# Altium PCB MODULIQ_TDC.PcbDoc (part 2 of 2)
Units mm, origin at the board's own origin, x right, y up, seen from the top; angles counter-clockwise.
Board outline 49.15 x 76.65 mm, 4 copper layers (L1, P2, L3, L4), stack 1.512 mm thick; 110 components, 101 nets, 467 pads, 506 vias.
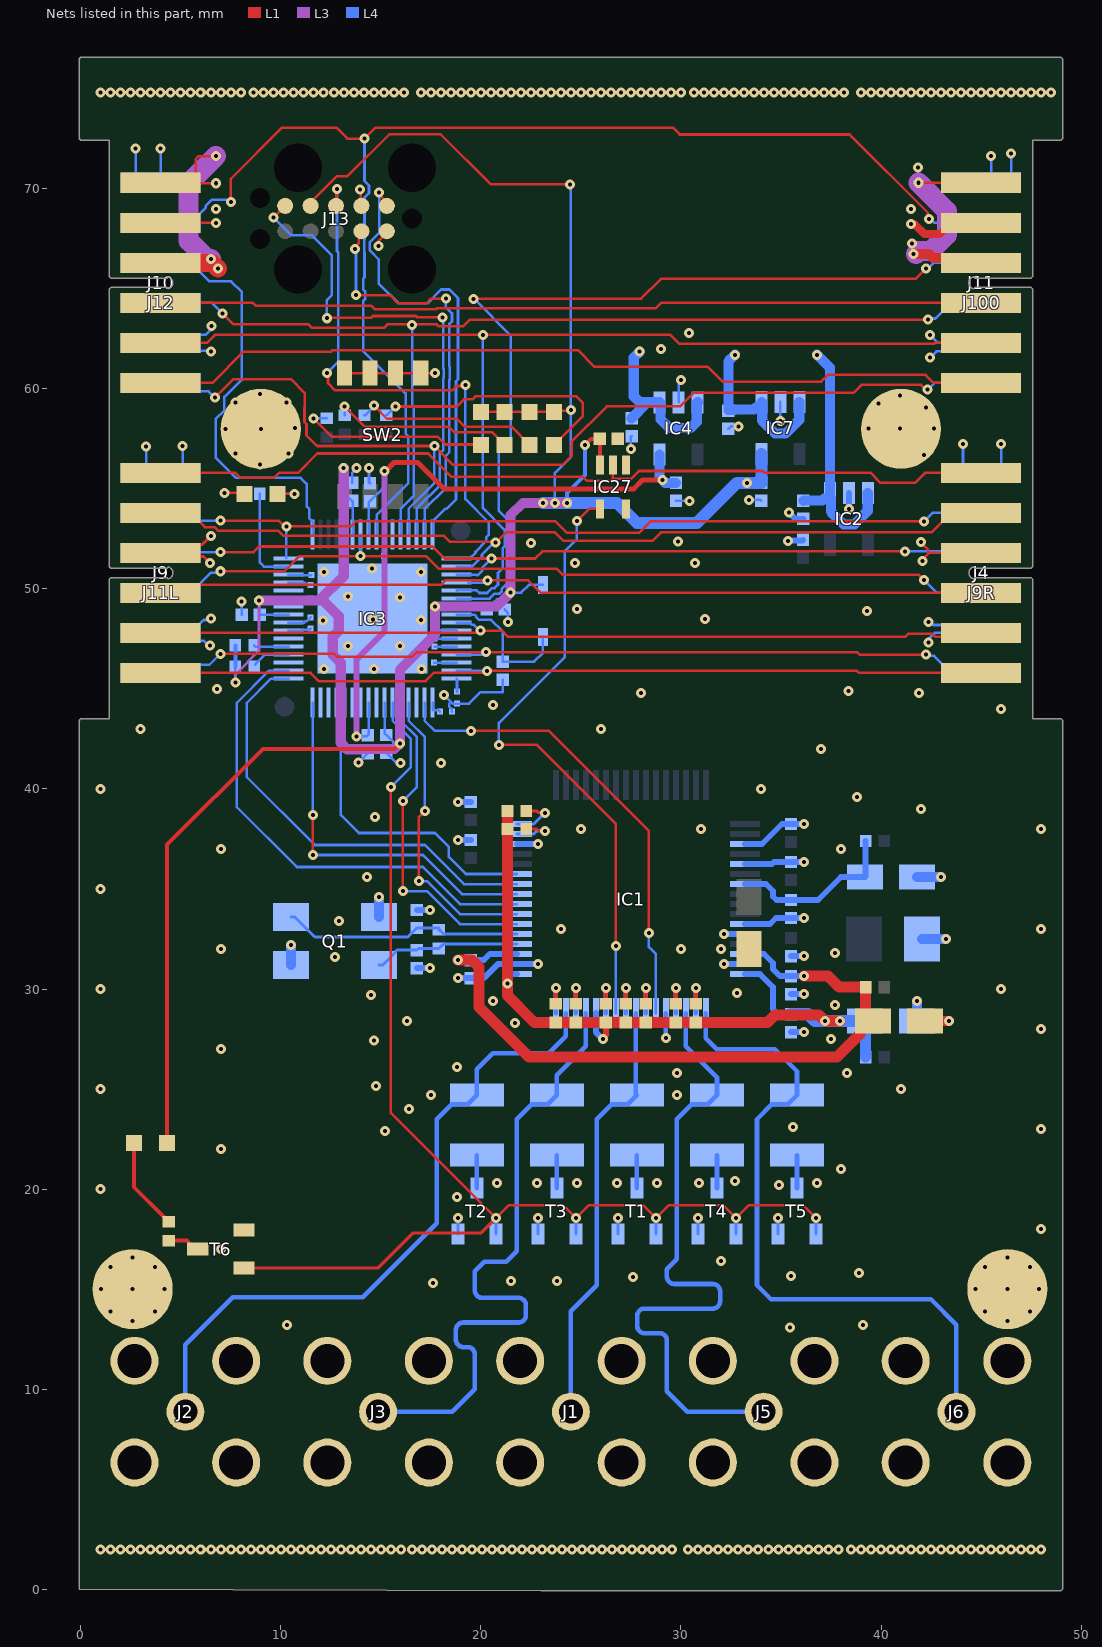
[diagram p4: the nets of this part, all layers, seen from the top]

## Via types
v1: diameter 0.5, hole 0.2, L1 to L4, tented both sides, 505 vias
v2: diameter 0.5, hole 0.2, L1 to L4, 1 vias

## Nets (pads, with @x,y where several pads share a name; then routed paths per layer and width w, separated by ;. In a path a pad name is that pad's centre, name@x,y a point inside that pad or via, vN(x,y) a via of type N, cw(c..) or ccw(c..) an arc to the next point about the centre after c; other vN are vias at no path point) (continued)
GND: C1.1 C2.1 C3.1 C4.1 C5.1 C6.2 C7.1 C8.1 C9.2 C10.1 C11.1 C12.2 C13.1 C14.1 C15.1 C16.1 C17.2 C18.1 C19.1 C20.1 C21.1 C22.1 C23.2 C24.1 C25.1 C26.1 C27.1 C61.1 C231.1 C232.1 IC1.19 IC1.21 IC1.27 IC1.28 IC1.31 IC1.37 IC1.50 IC1.62 IC2.2 IC3.65 IC4.2 IC7.2 IC27.1 IC27.5 J1.2 J2.2 J3.2 J4.1 J4.5 J4.9 J5.2 J6.2 J9.1 J9.5 J9.9 J9R.2 J9R.9 J10.7 J10.11 J11.7 J11.11 J11L.2 J11L.9 J12.9 J13.2 J13.10 J100.9 LD1.1 MP1.1 MP2.1 MP3.1 MP4.1 NT1.2 NT2.2 NT3.2 NT4.2 NT5.2 NT6.2 NT7.2 NT9.2 NT10.2 NT11.2 NT12.2 NT13.2 Q1.2 Q1.4 SW2.5 SW2.6 SW2.7 SW2.8 T1.2 T2.2 T3.2 T4.2 T5.2 T6.2 | length 104.2
  L1 w0.13: v1(6.504,61.86) v1@6.543,61.821 ; v1(7.187,54.803) 8.122,54.803 LD1.1@8.175,54.75 ; SW2.8@13.19,60.78 v1(17.7,60.78) ; v1(13.958,69.972) 13.994,69.937 13.994,69.181 J13.2@14.03,69.145 ; v1(14.896,67.13) 14.896,67.39 15.3,67.794 J13.10@15.3,67.875 ; v1(42,52.352) 42,52.305 42.369,51.936 42.369,51.8 ; v1(42.075,51.398) 42.075,51.478 42.369,51.772 42.369,51.8 ; J4.9@45,51.8 42.369,51.8
  L1 w0.152: v1(6.466,51.289) 6.139,51.616 4.184,51.616 J11L.2@4,51.8 5.5,51.8 5.924,52.224 6.081,52.224 v1(6.505,52.648)
  L1 w0.5: C6.2@42.2,28.4 v1(43.4,28.4)
  L4 w0.13: v1(2.75,72) 2.75,70.698 3.148,70.3 J10.7@4,70.3 v1(4,72) ; v1(3.269,57.107) 3.269,56.198 3.667,55.8 J9.1@4,55.8 4.702,55.8 5.1,56.198 v1(5.1,57.144) ; J11L.9@4,47.8 4.398,47.402 6.156,47.402 6.383,47.175 v1(6.463,47.175) v1@6.491,47.203 ; J11L.9@5.5,47.8 6.149,48.448 6.454,48.448 v1(6.521,48.515) ; v1(6.504,61.86) 6.463,61.902 4.398,61.902 J12.9@4,62.3 4.398,62.698 6.247,62.698 6.487,62.938 6.487,63.093 v1(6.543,63.15) ; v1(8.047,49.366) 8.047,48.718 C19.1@8.05,48.715 ; C4.1@13.57,55.3 13.566,55.305 13.566,55.793 13.779,56.006 v1(13.779,56.043) ; v1(13.89,41.328) C21.1@14.35,41.788 ; v1(14.411,56.043) 14.411,55.334 C232.1@14.46,55.285 ; C2.1@15.275,41.798 15.781,41.291 v1(15.988,41.291) ; v1(18.152,44.7) 18.587,44.265 NT2.2@18.808,44.265 19.408,44.265 19.979,44.836 21.1,44.836 C18.1@21.1,45.465 ; 18.43,44.265 18.43,44.108 18.55,43.988 NT3.2@18.55,43.865 ; C3.1@21.191,48.97 21.353,48.807 v1(21.353,48.35) ; v1(27.5,57) 27.5,57.598 C231.1@27.535,57.633 ; C61.1@29.752,54.4 29.754,54.398 v1(30.421,54.398) ; IC4.2@29.887,59.325 29.887,60.245 30,60.359 v1(30,60.439) ; C20.1@32.372,57.997 32.5,58.125 v1(32.875,58.125) ; v1(33.403,54.453) 33.966,54.453 C11.1@34.019,54.4 ; v1(34.969,58.4) IC7.2@34.969,59.35 ; v1(42.369,47.326) 42.401,47.358 42.401,47.515 42.686,47.8 J9R.9@45,47.8 44.602,48.198 42.607,48.198 42.455,48.35 v1(42.375,48.35) ; v1(42.455,61.565) 42.766,61.876 44.576,61.876 J100.9@45,62.3 42.854,62.3 v1(42.455,62.698) ; v1(44.1,57.25) 44.1,56.198 44.498,55.8 J4.1@45,55.8 45.602,55.8 46,56.198 v1(46,57.25) ; v1(45.5,71.625) 45.5,70.698 45.102,70.3 J11.7@45,70.3 46.102,70.3 46.5,70.698 46.5,71.625 v1(46.5,71.75)
  L4 w0.152: T2.2@18.85,17.75 v1(18.85,18.55) ; T3.2@22.85,17.75 v1(22.85,18.55) ; T1.2@26.85,17.75 v1(26.85,18.55) ; T4.2@30.85,17.75 v1(30.85,18.55) ; T5.2@34.85,17.75 v1(34.85,18.55)
  L4 w0.23: v1(29.25,27.55) IC1.37@29.25,28.8
  L4 w0.3: C5.1@16.8,31.05 v1(17.45,31.05) ; C1.1@16.8,33.95 v1(17.45,33.95) ; v1(18.85,30.55) C8.1@19.5,30.55 20.15,30.55 20.85,31.25 IC1.50@21.8,31.25 v1(22.85,31.25) ; v1(18.85,37.45) C13.1@19.5,37.45 ; v1(18.85,39.35) C15.1@19.5,39.35 ; IC1.62@21.8,37.25 v1(22.85,37.25) ; v1(32.15,31.25) IC1.31@33.2,31.25 ; v1(32.15,32.75) IC1.28@33.2,32.75 ; IC1.27@33.2,33.25 34.45,33.25 34.75,33.55 C24.1@35.5,33.55 v1(36.15,33.55) ; IC1.21@33.2,36.25 34.55,36.25 34.65,36.35 C14.1@35.5,36.35 v1(36.15,36.35) ; IC1.19@33.2,37.25 34.05,37.25 35.05,38.25 C16.1@35.5,38.25 v1(36.15,38.25) ; v1(35.35,52.387) 35.382,52.418 36.068,52.418 C26.1@36.1,52.45 ; v1(35.4,53.814) 35.712,53.503 C25.1@36.12,53.503 ; C10.1@35.5,27.85 v1(36.15,27.85) ; C7.1@35.5,29.75 v1(36.15,29.75) ; C22.1@35.5,31.65 v1(36.15,31.65) ; v1(38.4,54) IC2.2@38.4,54.8
  L4 w0.5: Q1.2@10.5,31.2 v1(10.5,32.2) ; Q1.4@14.9,33.6 v1(14.9,34.6) ; C9.2@41.8,28.4 v1(41.8,29.4) ; C23.2@41.8,35.6 v1(43,35.6) ; C17.2@42.05,32.5 v1(43.25,32.5)
  other v1: 1,2 1.5,2 2,2 2.5,2 3,2 3.5,2 4,2 4.5,2 5,2 5.5,2 6,2 6.5,2 7,2 7.5,2 8,2 8.5,2 9,2 9.5,2 10,2 10.5,2 11,2 11.5,2 12,2 12.516,2 13.016,2 13.516,2 14.016,2 14.516,2 15.016,2 15.516,2 16.016,2 16.549,2 17.049,2 17.549,2 18.049,2 18.549,2 19.049,2 19.549,2 20.049,2 20.549,2 21.049,2 21.549,2 22.049,2 22.549,2 23.049,2 23.549,2 24.049,2 24.549,2 25.049,2 25.549,2 26.049,2 26.549,2 27.049,2 27.549,2 28.049,2 28.549,2 29.049,2 29.549,2 30.35,2 30.85,2 31.35,2 31.85,2 32.35,2 32.85,2 33.35,2 33.85,2 34.366,2 34.866,2 35.366,2 35.866,2 36.366,2 36.866,2 37.366,2 37.866,2 38.5,2 39,2 39.5,2 40,2 40.5,2 41,2 41.5,2 42,2 42.5,2 43,2 43.5,2 44,2 44.5,2 45,2 45.5,2 46,2 46.5,2 47,2 47.5,2 48,2 35.443,13.083 10.3,13.2 39.1,13.2 2.6,13.415 46.315,13.415 1.479,13.879 3.721,13.879 45.194,13.879 47.436,13.879 1.015,15 2.6,15 4.185,15 44.73,15 46.315,15 47.9,15 17.6,15.3 21.5,15.4 23.8,15.4 27.6,15.6 35.507,15.669 38.9,15.8 1.479,16.121 3.721,16.121 45.194,16.121 47.436,16.121 32,16.4 2.6,16.585 46.315,16.585 7,17 48,18 18.8,19.6 1,20 34.9,20.2 20.8,20.3 22.8,20.3 24.8,20.3 26.8,20.3 28.8,20.3 30.9,20.3 36.8,20.3 32.7,20.4 38,21 7,22 15.2,22.9 48,23 35.6,23.1 16.4,24 17.5,24.7 29.8,24.7 1,25 41,25 14.766,25.145 29.8,25.8 38.3,25.8 18.8,26.1 7,27 14.663,27.426 37.5,27.5 48,28 21.7,28.3 16.3,28.4 37.7,29.2 20.6,29.4 14.5,29.7 32.8,29.8 1,30 46,30 12.7,31.6 37.7,31.8 7,32 30,32 32,32 24,33 48,33 12.9,33.4 1,35 14.3,35.6 7,37 38,37 25,38 31,38 48,38 14.7,38.6 42,39 38.8,39.6 1,40 34,40 18,41.3 37,42 3,43 26,43 46,44 20.6,44.2 28,44.8 41.9,44.8 38.372,44.895 6.8,45 12.162,45.995 14.66,45.995 17.021,45.995 13.356,47.156 15.96,47.156 12.099,48.428 17.01,48.438 14.599,48.468 31.2,48.5 39.3,48.9 24.8,49 15.96,49.562 13.356,49.618 12.151,50.836 17.011,50.838 14.566,51.016 24.7,51.3 30.7,51.3 22.5,52.3 29.841,52.357 8.95,56.228 42.144,56.688 7.73,56.758 10.388,56.758 7.225,58 9,58 39.369,58.013 40.96,58.013 42.644,58.013 10.7,58.05 42.244,59.063 39.869,59.263 7.73,59.325 10.274,59.325 40.96,59.665 8.955,59.75 29,62 30.4,62.8 1,74.8 1.5,74.8 2,74.8 2.5,74.8 3,74.8 3.5,74.8 4,74.8 4.5,74.8 5,74.8 5.5,74.8 6,74.8 6.5,74.8 7,74.8 7.5,74.8 8,74.8 8.641,74.8 9.141,74.8 9.641,74.8 10.141,74.8 10.641,74.8 11.141,74.8 11.641,74.8 12.141,74.8 12.656,74.8 13.156,74.8 13.656,74.8 14.156,74.8 14.656,74.8 15.156,74.8 15.656,74.8 16.156,74.8 17,74.8 17.5,74.8 18,74.8 18.5,74.8 19,74.8 19.5,74.8 20,74.8 20.5,74.8 21,74.8 21.5,74.8 22,74.8 22.5,74.8 23,74.8 23.5,74.8 24,74.8 24.5,74.8 25,74.8 25.5,74.8 26,74.8 26.5,74.8 27,74.8 27.5,74.8 28,74.8 28.5,74.8 29,74.8 29.5,74.8 30,74.8 30.641,74.8 31.141,74.8 31.641,74.8 32.141,74.8 32.641,74.8 33.141,74.8 33.641,74.8 34.141,74.8 34.656,74.8 35.156,74.8 35.656,74.8 36.156,74.8 36.656,74.8 37.156,74.8 37.656,74.8 38.156,74.8 39,74.8 39.5,74.8 40,74.8 40.5,74.8 41,74.8 41.5,74.8 42,74.8 42.5,74.8 43,74.8 43.5,74.8 44,74.8 44.5,74.8 45,74.8 45.5,74.8 46,74.8 46.5,74.8 47,74.8 47.5,74.8 48,74.8 48.5,74.8
HSPI_AD0: IC3.18 J4.8 J9.8 J9R.1 J11L.1 | length 45.1
  L1 w0.13: J9.8@4,53.8 5.5,53.8 6.21,53.09 6.688,53.09 6.862,52.916 9.857,52.916 10.126,52.648 18.152,52.648 18.448,52.352 20.703,52.352 v1(20.737,52.318) ; v1@20.737,52.352 20.772,52.352 21.249,52.829 23.7,52.829 24.129,52.4 28.571,52.4 29,52.829 42.529,52.829 43.5,53.8 J4.8@45,53.8
  L4 w0.13: IC3.18@18.788,51.115 19.559,51.115 20.057,51.612 20.057,51.715 20.659,52.318 v1(20.737,52.318)
HSPI_AD1: IC3.20 J4.10 J9.10 J9R.3 J11L.3 | length 42.5
  L1 w0.13: J9.10@4,49.8 5.5,49.8 5.9,50.2 18,50.2 18.231,50.431 v1(20.333,50.431) 22.369,50.431 23,49.8 J4.10@45,49.8
  L4 w0.13: IC3.20@19.373,50.315 20.123,50.315 20.239,50.431 v1(20.333,50.431)
HSPI_AD2: IC3.31 J4.12 J9.12 J9R.5 J11L.5 | length 42.9
  L1 w0.13: J9.12@4,45.8 11.488,45.8 11.894,45.394 17.232,45.394 17.637,45.8 20.131,45.8 20.219,45.888 v1(20.3,45.888) ; v1@20.3,45.915 38.785,45.915 38.9,45.8 J4.12@45,45.8
  L4 w0.13: IC3.31@18.788,45.915 20.273,45.915 v1(20.3,45.888)
HSPI_AD3: IC3.19 J4.3 J9.3 J9R.7 J11L.7 | length 43.7
  L1 w0.13: v1(6.975,51.836) 8.641,51.836 8.923,52.119 17.581,52.119 18.183,51.517 v1(20.534,51.517) 22.717,51.517 23.075,51.875 v1(41.2,51.875)
  L4 w0.13: J9.3@4,51.8 4.036,51.836 v1(6.975,51.836) ; IC3.19@18.788,50.715 19.758,50.715 19.788,50.685 19.846,50.685 20.062,50.901 20.062,51.046 v1(20.534,51.517) ; v1(41.2,51.875) 44.925,51.875 J4.3@45,51.8
HSPI_CLK: IC3.7 J4.4 J9.4 J9R.8 J11L.8 | length 43.6
  L1 w0.13: v1(6.995,50.882) 10.182,50.882 10.942,51.642 v1(13.976,51.642) 17.258,51.642 17.9,51 23.8,51 24.1,50.7 41.892,50.7 v1(42.155,50.436)
  L4 w0.13: J9.4@4,49.8 5.5,49.8 6.516,50.816 6.929,50.816 v1(6.995,50.882) ; v1(13.976,51.642) 13.982,51.648 13.982,52.709 IC3.7@13.988,52.715 ; v1(42.155,50.436) 42.792,49.8 J4.4@45,49.8
HSPI_CS0: IC3.29 J4.6 J9.6 J9R.10 J11L.10 | length 43.5
  L1 w0.13: v1(6.975,46.75) 12.663,46.75 12.813,46.6 16.561,46.6 16.803,46.842 v1(20.265,46.842) ; v1@20.311,46.796 20.357,46.842 38.802,46.842 38.934,46.71 v1(42.25,46.71)
  L4 w0.13: J9.6@4,45.8 4.4,46.2 6.425,46.2 v1(6.975,46.75) ; IC3.29@18.788,46.715 20.057,46.715 20.184,46.842 v1(20.265,46.842) ; v1(42.25,46.71) 42.307,46.653 42.647,46.653 43.5,45.8 J4.6@45,45.8
HSPI_ID: IC3.64 J4.2 J9.2 J9R.6 J11L.6 | length 43.6
  L1 w0.13: v1(6.988,53.414) 7.003,53.4 9.905,53.4 10.18,53.125 13.5,53.125 13.747,53.372 23.728,53.372 24.3,52.8 27.9,52.8 28.472,53.372 v1(42.154,53.372)
  L4 w0.13: J9.2@4,53.8 4.4,53.4 6.974,53.4 v1(6.988,53.414) ; IC3.64@10.274,51.539 v1(10.274,53.125) ; v1(42.154,53.372) 42.154,53.374 42.58,53.8 J4.2@45,53.8
HSPI_Q: IC3.25 J4.11 J9.11 J9R.4 J11L.4 | length 42.8
  L1 w0.13: J9.11@4,47.8 19.779,47.8 19.894,47.915 21.052,47.915 21.367,47.6 41.2,47.6 41.368,47.768 42.552,47.768 42.72,47.6 44.8,47.6 J4.11@45,47.8
  L4 w0.13: IC3.25@18.788,48.315 19.438,48.315 19.535,48.218 19.623,48.218 19.926,47.915 v1(19.988,47.915)
HSPI_sAD0: IC3.12 J10.10 J11.10 J12.8 J100.8 | length 52.9
  L1 w0.13: v1(7.089,63.775) 7.64,63.224 11.376,63.224 11.549,63.051 15.151,63.051 15.324,63.224 v1@16.56,63.224 ; v1(16.56,63.189) v1@16.56,63.224 ; v1(42.344,63.46) 19.46,63.46 19.118,63.118 17.892,63.118 17.786,63.224 v1@16.56,63.224
  L4 w0.13: J10.10@4,64.3 6.564,64.3 v1(7.089,63.775) ; IC3.12@15.988,52.715 15.988,54 16.65,54.661 16.65,55.5 16.654,55.505 16.654,59.067 16.573,59.148 16.573,63.176 v1(16.56,63.189) ; v1(42.344,63.46) 42.401,63.517 42.717,63.517 43.5,64.3 J11.10@45,64.3
HSPI_sAD1: IC3.13 J10.12 J11.12 J12.10 J100.10 | length 51.9
  L1 w0.13: v1(6.702,59.559) 7.626,60.483 10.502,60.483 11.189,59.796 11.189,59.066 11.188,59.065 11.188,58.335 11.283,58.239 11.283,57.672 11.812,57.142 v1(17.671,57.142) 18.609,56.204 24.084,56.204 24.535,56.655 24.535,57.359 26.296,59.121 29.943,59.121 30.618,59.796 38.619,59.796 39.026,60.203 41.913,60.203 41.915,60.201 42.006,60.201 42.24,59.967 v1(42.334,59.967)
  L4 w0.13: J10.12@4,60.3 4.425,59.875 6.386,59.875 v1(6.702,59.559) ; IC3.13@16.388,52.715 16.388,54.007 17.671,55.289 v1(17.671,57.142) ; v1(42.334,59.967) 42.341,59.967 42.673,60.3 J11.12@45,60.3
IO0: IC1.38 IC3.34 | length 23.6
  L1 w0.127: v1(19.5,42.9) 23.4,42.9 28.4,37.9 v1(28.4,32.8)
  L4 w0.127: IC3.34@17.188,44.315 17.188,43.412 17.7,42.9 v1(19.5,42.9) ; v1(28.4,32.8) 28.4,32.1 28.75,31.75 IC1.38@28.75,28.8
IO1: IC3.35
IO2: IC1.55 IC3.36 | length 15
  L1 w0.127: v1(16.9,35.4) 16.9,38.6 v1(17.2,38.9)
  L4 w0.127: IC3.36@16.388,44.315 16.388,43.412 17.2,42.6 v1(17.2,38.9) ; v1(16.9,35.4) 17.3,35.4 18.95,33.75 IC1.55@21.8,33.75
IO3: IC1.54 IC3.37 | length 16.4
  L1 w0.127: v1(16.1,34.9) v1(16.1,39.4)
  L4 w0.127: IC3.37@15.988,44.315 15.988,43.412 16.8,42.6 16.8,40.1 v1(16.1,39.4) ; v1(16.1,34.9) 17.3,34.9 18.95,33.25 IC1.54@21.8,33.25
IO4: IC3.38 T1.1 T2.1 T3.1 T4.1 T5.1 T6.1 | length 64.5
  L1 w0.127: v1(15.5,40.1) 15.5,23.8 v1(20.75,18.55) 21.4,19.2 24.1,19.2 v1(24.75,18.55) 25.4,19.2 28.1,19.2 v1(28.75,18.55) 29.4,19.2 32.1,19.2 v1(32.75,18.55) 33.4,19.2 36.1,19.2 v1(36.75,18.55)
  L1 w0.152: T6.1@8.15,16.05 14.85,16.05 16.6,17.8 20,17.8 v1(20.75,18.55)
  L4 w0.127: v1(15.5,40.1) 16.5,41.1 16.5,42.5 15.588,43.412 IC3.38@15.588,44.315
  L4 w0.152: T2.1@20.75,17.75 v1(20.75,18.55) ; T3.1@24.75,17.75 v1(24.75,18.55) ; T1.1@28.75,17.75 v1(28.75,18.55) ; T4.1@32.75,17.75 v1(32.75,18.55) ; T5.1@36.75,17.75 v1(36.75,18.55)
IO5: IC3.40
IO6: IC3.42
IO7: IC3.43
MODBUS_A: J10.4 J11.4 J12.3 J100.3 | length 41.3
  L1 w0.13: J10.4@4,64.3 8.608,64.3 8.762,64.146 14.528,64.146 14.705,63.969 17.746,63.969 17.801,64.024 28.737,64.024 29.012,64.3 J11.4@45,64.3
MODBUS_B: J10.6 J11.6 J12.5 J100.5 | length 42.6
  L1 w0.13: J10.6@4,60.3 6.584,60.3 8.144,61.86 12.515,61.86 12.59,61.936 24.845,61.936 25.68,61.1 31.341,61.1 32.083,60.358 37,60.358 37.342,60.7 42.226,60.7 42.626,60.3 J11.6@45,60.3
NetIC1_34: IC1.34 R17.1 | length 2
  L1 w0.23: R17.1@30.75,29.27 v1(30.75,30.05)
  L4 w0.23: IC1.34@30.75,28.8 v1(30.75,30.05)
NetIC1_36: IC1.36 R14.1 | length 2
  L1 w0.23: R14.1@29.75,29.27 v1(29.75,30.05)
  L4 w0.23: IC1.36@29.75,28.8 v1(29.75,30.05)
NetIC1_39: IC1.39 R5.1 | length 2
  L1 w0.23: R5.1@28.25,29.27 v1(28.25,30.05)
  L4 w0.23: IC1.39@28.25,28.8 v1(28.25,30.05)
NetIC1_41: IC1.41 R1.1 | length 2
  L1 w0.23: R1.1@27.25,29.27 v1(27.25,30.05)
  L4 w0.23: IC1.41@27.25,28.8 v1(27.25,30.05)
NetIC1_43: IC1.43 R8.1 | length 2
  L1 w0.23: R8.1@26.25,29.27 v1(26.25,30.05)
  L4 w0.23: IC1.43@26.25,28.8 v1(26.25,30.05)
NetIC1_46: IC1.46 R12.1 | length 2
  L1 w0.23: R12.1@24.75,29.27 v1(24.75,30.05)
  L4 w0.23: IC1.46@24.75,28.8 v1(24.75,30.05)
NetIC1_48: IC1.48 R7.1 | length 2
  L1 w0.23: R7.1@23.75,29.27 v1(23.75,30.05)
  L4 w0.23: IC1.48@23.75,28.8 v1(23.75,30.05)
NetIC1_63: IC1.63 R3.1 | length 2.4
  L1 w0.15: R3.1@22.27,38 22.8,38 22.864,37.936 23.164,37.936 v1(23.2,37.9)
  L4 w0.15: IC1.63@21.8,37.75 22.65,37.75 22.8,37.9 v1(23.2,37.9)
NetIC1_64: IC1.64 R4.1 | length 2.6
  L1 w0.15: R4.1@22.27,38.9 22.8,38.9 22.864,38.836 23.164,38.836 v1(23.2,38.8)
  L4 w0.15: IC1.64@21.8,38.25 22.65,38.25 v1(23.2,38.8)
NetLD1_2: LD1.2 R34.1 | length 1.6
  L1 w0.13: LD1.2@9.825,54.75 v1(10.677,54.75)
  L4 w0.13: R34.1@9.895,54.75 v1(10.677,54.75)
NetLD2_1: LD2.1 R6.1 | length 4.7
  L1 w0.2: LD2.1@2.675,22.3 2.675,20.095 4.19,18.58 4.19,18.56 4.38,18.37 R6.1@4.4,18.37
NetLD18_1: LD18.1 R26.1 | length 13.1
  L1 w0.13: v1(15.735,59.115) 18.8,59.115 19.155,59.47 19.574,59.47 19.729,59.625 24.775,59.625 25.1,59.3 25.1,58.632 LD18.1@23.656,57.188
  L4 w0.13: R26.1@15.275,58.675 15.295,58.675 v1(15.735,59.115)
NetLD19_1: LD19.1 R27.1 | length 9.3
  L1 w0.13: v1(14.65,59.172) 15.322,58.5 18.8,58.5 19.192,58.108 21.522,58.108 LD19.1@22.427,57.203
  L4 w0.13: R27.1@14.185,58.675 14.205,58.675 14.65,59.12 v1(14.65,59.172)
NetLD20_1: LD20.1 R32.1 | length 9.2
  L1 w0.13: v1(13.19,59.115) 14.205,58.1 18.4,58.1 18.669,57.831 20.557,57.831 LD20.1@21.185,57.203
  L4 w0.13: R32.1@13.19,58.675 v1(13.19,59.115)
NetLD21_1: LD21.1 R33.1 | length 9.6
  L1 w0.13: v1(11.641,58.522) 12.563,57.6 17.854,57.6 18.237,57.218 19.985,57.218 LD21.1@20,57.203
  L4 w0.13: v1(11.641,58.522) R33.1@12.303,58.522
NetR2_1: R2.1 T1.3 | length 1.6
  L4 w0.23: T1.3@27.8,20.05 R2.1@27.8,21.7
NetR6_2: R6.2 T6.3 | length 1.7
  L1 w0.2: R6.2@4.4,17.43 5.308,17.43 5.425,17.313 5.425,17.225 5.65,17 T6.3@5.85,17
NetR9_1: R9.1 T2.3 | length 1.6
  L4 w0.23: T2.3@19.8,20.05 R9.1@19.8,21.7
NetR15_1: R15.1 T3.3 | length 1.6
  L4 w0.23: T3.3@23.8,20.05 R15.1@23.8,21.7
NetR18_1: R18.1 T4.3 | length 1.7
  L4 w0.23: T4.3@31.8,20.05 R18.1@31.8,21.7
NetR19_1: R19.1 T5.3 | length 1.6
  L4 w0.23: T5.3@35.8,20.05 R19.1@35.8,21.7
P1V8: C21.2 C61.2 C232.2 IC3.8 IC3.41 IC4.5 | length 36.4
  L1 w0.254: v1(15.188,55.894) 15.243,55.894 15.662,56.313 16.843,56.313 18.155,55 27.645,55 28.083,55.438 v1(29.075,55.438)
  L3 w0.3: v1(13.792,42.633) 13.792,46.492 15.188,47.888 v1(15.188,55.894)
  L4 w0.13: v1(13.792,42.633) 14.296,42.633 C21.2@14.35,42.688 14.388,42.726 IC3.41@14.388,44.315 ; IC3.8@14.388,52.715 14.388,54.314 C232.2@14.46,54.385 14.847,54.772 14.854,54.772 15.188,55.106 v1(15.188,55.894)
  L4 w0.5: IC4.5@28.937,56.725 28.937,55.577 v1(29.075,55.438) 29.213,55.3 C61.2@29.752,55.3
P3V3: C2.2 C3.2 C4.2 C11.2 C19.2 C27.2 D5.1 IC3.6 IC3.23 IC3.39 IC3.57 IC7.5 IC27.3 J13.4 LD2.2 LD18.2 LD19.2 LD20.2 LD21.2 R24.1 R25.1 | length 158
  L1 w0.13: J13.4@11.49,69.145 11.49,69.317 12.804,70.631 13.331,70.631 15.424,72.724 17.994,72.724 20.501,70.217 v1(24.467,70.217) ; LD21.2@20,58.853 LD20.2@21.185,58.853 LD19.2@22.427,58.853 23.641,58.853 LD18.2@23.656,58.838 23.729,58.911 24.477,58.911 v1(24.5,58.934)
  L1 w0.2: LD2.2@4.325,22.3 4.325,37.225 9.1,42 15.678,42 v1(15.95,42.272) ; v1(25.2,57.2) 25.5,57.5 C27.2@25.95,57.5 IC27.3@25.95,56.2
  L3 w0.13: v1(7.73,45.33) 7.73,45.73 8.92,46.92
  L3 w0.15: 8.92,46.92 v1(8.92,49.423)
  L3 w0.5: v1(15.95,42.272) 15.95,45.95 17.715,47.715 v1(17.715,49.115) 20.793,49.115 v1(21.487,49.809) 21.487,53.687 22.1,54.3 v1(23.1,54.3) v1(23.7,54.3) v2(24.3,54.3)
  L3 w0.52: v1(8.92,49.423) 11.923,49.423 ; v1(13.141,56.043) 13.141,50.641 11.923,49.423 ; v1(15.95,42.272) 15.678,42 14.059,42 14.056,41.996 13.308,41.996 13,42.304 13,46.3 12.6,46.7 12.6,47.6 12.9,47.9 12.9,48.628 12.104,49.423 11.923,49.423
  L4 w0.127: v1(33.291,55.305) C11.2@34.019,55.305
  L4 w0.13: v1(7.73,45.33) R24.1@7.73,46.1 ; v1(8.92,49.423) 8.92,48.745 C19.2@8.95,48.715 IC3.57@10.388,48.715 ; v1(13.141,56.043) 13.075,55.976 13.075,55.712 13.057,55.694 13.057,54.906 13.176,54.787 13.183,54.787 C4.2@13.57,54.4 13.588,54.382 IC3.6@13.588,52.715 ; IC3.39@15.188,44.315 15.188,42.784 C2.2@15.275,42.698 15.634,42.338 15.884,42.338 v1(15.95,42.272) ; v1(17.715,49.115) IC3.23@18.788,49.115 20.146,49.115 C3.2@20.291,48.97 20.677,49.357 20.677,49.364 20.796,49.483 21.161,49.483 v1@21.486,49.809 ; v1(21.487,49.809) 22.009,49.809 22.4,50.2 D5.1@23.1,50.2 ; v1(23.7,54.3) 23.7,55.8 24.5,56.6 v1(24.5,58.934) 24.483,58.95 24.483,70.2 v1(24.467,70.217) 24.483,70.2 24.483,58.95 v1(24.5,58.934) ; C11.2@34.019,55.3 IC7.5@34.019,56.75
  L4 w0.2: R24.1@7.73,46.1 R25.1@7.73,47.175 ; v2(24.3,54.3) 24.3,54.8 25.2,55.7 v1(25.2,57.2)
  L4 w0.6: v1(23.1,54.3) v1(23.7,54.3) v2(24.3,54.3) 26.8,54.3 27.8,53.3 30.8,53.3 32.8,55.3 C11.2@34.019,55.3 34.019,55.305 IC7.5@34.019,56.75
P5V0: C20.2 C25.2 C231.2 IC2.1 IC2.3 IC4.1 IC4.3 IC7.1 IC7.3 J10.2 J11.2 J12.1 J100.1 | length 37
  L1 w0.13: J10.2@4,68.3 v1(6.75,68.3)
  L1 w0.4: v1(41.5,68.231) 41.523,68.208 41.691,68.208 42.166,67.732 42.933,67.732 43.5,68.3 J100.1@45,68.3
  L4 w0.508: C231.2@27.535,58.533 28.251,59.248 ; v1(27.939,61.86) 27.644,61.565 27.644,59.623 27.942,59.325 IC4.1@28.937,59.325 28.983,59.279 28.983,58.479 29.412,58.05 30.493,58.05 30.791,58.348 30.791,59.279 IC4.3@30.837,59.325 ; v1(32.7,61.7) 32.372,61.372 32.372,58.953 32.689,58.953 32.708,58.972 33.641,58.972 33.723,59.054 33.973,59.054 34.019,59.1 IC7.1@34.019,59.35 34.065,59.304 34.065,58.412 34.708,57.769 35.231,57.769 35.91,58.448 35.91,59.34 IC7.3@35.919,59.35 ; C25.2@36.12,54.403 36.139,54.422 37.072,54.422 37.154,54.504 37.404,54.504 IC2.1@37.45,54.55 ; v1(36.8,61.7) 37.45,61.05 IC2.1@37.45,54.8 ; IC2.1@37.496,54.504 37.496,53.862 38.139,53.219 38.661,53.219 39.34,53.898 39.34,54.79 IC2.3@39.35,54.8
  other v1: 6.75,69 41.5,69
P12V0: J10.1 J10.3 J11.1 J11.3 J12.2 J100.2 | length 27.9
  L1 w0.13: J10.3@4,66.3 J10.3@4.046,66.346 ; v1@6.365,66.346 v1(6.5,66.481) ; v1(6.75,70.275) 4.025,70.275 J10.1@4,70.3 5.5,70.3 5.75,70.55 5.75,71.482 5.893,71.625 v1(6.75,71.625) ; v1(41.883,70.3) J11.1@45,70.3
  L1 w0.5: v1(41.624,66.75) 42.407,66.75 42.607,66.55 44.75,66.55 J11.3@45,66.3
  L1 w0.9: J10.3@4,66.3 6.572,66.3 v1(6.852,66.02)
  L3 w1: v1(6.5,66.481) 6.319,66.481 5.4,67.4 5.4,70.275 v1(6.75,71.625) ; v1@41.74,66.75 41.887,66.897 42.497,66.897 43.3,67.7 43.3,68.883 v1(41.883,70.3)
  other v1: 41.539,67.267 41.845,71.05
PROJECT_ID0: IC3.54
PROJECT_ID1: IC3.55 NT12.1 | length 1.1
  L4 w0.13: IC3.55@10.388,47.915 11.038,47.915 11.088,47.965 11.438,47.965 NT12.1@11.488,48.015
PROJECT_ID2: IC3.56 NT13.1 | length 1.2
  L4 w0.13: IC3.56@10.388,48.315 11.167,48.315 11.244,48.392 11.305,48.392 NT13.1@11.488,48.575
PROJECT_ID3: IC3.58
PROJECT_ID4: IC3.59 NT9.1 | length 1.1
  L4 w0.13: IC3.59@10.388,49.515 NT9.1@11.488,49.515
PROJECT_ID5: IC3.60
PROJECT_ID6: IC3.61 NT10.1 | length 1.1
  L4 w0.13: IC3.61@10.388,50.315 11.19,50.315 11.305,50.2 NT10.1@11.488,50.2
PROJECT_ID7: IC3.62 NT11.1 | length 1.1
  L4 w0.13: IC3.62@10.388,50.715 11.038,50.715 11.068,50.685 NT11.1@11.525,50.685
REFOSCI: C5.2 IC1.52 Q1.1 R10.2 | length 7.4
  L4 w0.15: Q1.1@14.9,31.2 15.1,31.2 15.725,31.825 15.725,31.862 15.813,31.95 C5.2@16.8,31.95 16.88,32.03 R10.2@17.9,32.03 18.115,32.245 18.218,32.245 18.223,32.25 IC1.52@21.8,32.25
REFOSCO: C1.2 IC1.53 Q1.3 R10.1 | length 12.1
  L4 w0.15: Q1.3@10.5,33.6 10.7,33.6 11.7,32.6 16.35,32.6 C1.2@16.8,33.05 17.9,33.05 17.9,32.99 18.135,32.755 18.218,32.755 18.223,32.75 IC1.53@21.8,32.75
RESETn_I: IC3.1 J10.9 J12.7 | length 21.2
  L4 w0.13: J10.9@4,66.3 5.5,66.3 6.433,65.367 7.517,65.367 8.05,64.835 8.05,60.968 8.05,60.471 7.179,59.6 7.179,58.917 6.748,58.486 6.748,56.567 7.766,55.549 10.988,55.549 11.288,55.249 11.288,55.171 11.305,55.154 11.305,54.116 11.425,53.996 11.425,53.528 11.588,53.365 IC3.1@11.588,52.715
RESETn_O: IC3.22 J11.9 J100.7 | length 44.7
  L1 w0.13: v1(19.627,64.486) 19.65,64.509 28.009,64.509 29,65.5 41.73,65.5 v1(42.25,66.02)
  L4 w0.13: IC3.22@18.788,49.515 20.433,49.515 20.681,49.763 20.935,49.763 21.034,49.862 21.034,49.996 21.3,50.262 21.434,50.262 21.487,50.315 21.487,53.313 20.9,53.9 20.9,57.013 21.487,57.6 21.487,62.672 19.673,64.486 v1(19.627,64.486) ; v1(42.25,66.02) 42.344,66.02 42.624,66.3 J11.9@45,66.3
REV_ID0: IC3.28 NT1.1 | length 1.1
  L4 w0.13: NT1.1@17.688,47.115 IC3.28@18.788,47.115
REV_ID1: IC3.32 NT2.1 | length 0.7
  L4 w0.13: IC3.32@18.788,45.515 18.808,45.495 NT2.1@18.808,44.865
REV_ID2: IC3.33 NT3.1 | length 0.8
  L4 w0.13: IC3.33@17.588,44.315 17.588,43.963 17.612,43.939 17.876,43.939 NT3.1@17.95,43.865
REV_ID3: IC3.10 NT4.1 | length 1.1
  L4 w0.13: NT4.1@15.156,51.642 15.188,51.674 IC3.10@15.188,52.715
REV_ID4: IC3.11
REV_ID5: IC3.26 NT5.1 | length 1.2
  L4 w0.13: NT5.1@17.688,48.072 17.762,47.999 17.89,47.999 17.95,47.939 18.765,47.939 IC3.26@18.788,47.915
REV_ID6: IC3.27 NT6.1 | length 1.1
  L4 w0.13: NT6.1@17.688,47.515 IC3.27@18.788,47.515
REV_ID7: IC3.30 NT7.1 | length 1.1
  L4 w0.13: NT7.1@17.67,46.315 IC3.30@18.788,46.315
RSTn: C18.2 D5.2 IC3.24 | length 7.2
  L4 w0.13: IC3.24@18.788,48.715 19.688,48.715 19.777,48.626 19.777,48.576 19.896,48.457 20.505,48.457 21.1,47.862 C18.2@21.1,46.365 22.665,46.365 23.1,46.8 D5.2@23.1,47.6
RVDD33: C23.1 C24.2 IC1.23 R23.2 | length 8.8
  L4 w0.3: IC1.23@33.2,35.25 34.25,35.25 34.6,34.9 34.6,34.626 34.776,34.45 C24.2@35.5,34.45 36.85,34.45 38,35.6 C23.1@39.2,35.6 39.23,35.63 R23.2@39.23,37.4
SCL: IC3.9 J10.8 J11.8 J12.6 J100.6 | length 68
  L1 w0.13: v1(7.5,69.35) 7.5,70.5 10.053,73.053 12.786,73.053 13.336,72.503 v1(14.185,72.503) 14.735,73.053 29.6,73.053 29.943,72.71 38.431,72.71 42.336,68.805 42.336,68.564 v1(42.4,68.5)
  L4 w0.13: J10.8@4,68.3 5.5,68.3 6.243,69.043 6.243,69.134 6.562,69.453 7.303,69.453 7.406,69.35 v1(7.5,69.35) ; v1(14.185,72.503) 14.185,70.387 14.412,70.16 14.412,69.785 14.185,69.558 14.185,67.456 14.163,67.434 14.163,66.814 14.185,66.792 14.185,65.569 14.116,65.5 14.116,64.967 14.216,64.866 14.216,64.491 14.116,64.39 14.116,61.892 16.243,59.764 16.243,57.758 16.375,57.627 16.375,55.621 16.37,55.616 16.37,55.276 14.788,53.695 IC3.9@14.788,52.715 ; v1(42.4,68.5) 42.461,68.5 42.661,68.3 J11.8@45,68.3
SDA: IC3.21 J10.5 J11.5 J12.4 J100.4 | length 56.8
  L1 w0.13: J10.5@4,62.3 6.303,62.3 6.702,62.698 v1(20.098,62.698) 29.47,62.698 29.923,62.245 42.643,62.245 42.698,62.3 J11.5@45,62.3
  L4 w0.13: IC3.21@18.788,49.915 18.8,49.927 19.788,49.927 19.921,49.794 20.317,49.794 20.565,50.042 20.685,50.042 20.856,50.213 20.856,50.803 21.1,51.047 21.1,52.039 21.191,52.13 21.191,52.947 20.098,54.04 v1(20.098,62.698)
SPI_CS0: IC1.56 IC3.50 | length 24.5
  L4 w0.127: IC3.50@10.388,45.915 9.415,45.915 7.8,44.3 7.8,39.1 10.8,36.1 17.1,36.1 18.95,34.25 IC1.56@21.8,34.25
SPI_CS1: IC3.51
SPI_CS2: IC3.52 R24.2 | length 1.9
  L4 w0.13: R24.2@8.72,46.2 8.72,46.22 9.215,46.715 IC3.52@10.388,46.715
SPI_CS3: IC3.53 R25.2 | length 1.7
  L4 w0.13: R25.2@8.67,47.175 8.73,47.115 IC3.53@10.388,47.115
SPI_MISO0: IC1.59 IC3.44 | length 16
  L4 w0.127: IC3.44@13.188,44.315 13.188,43.188 13,43 13,38.7 13.9,37.8 17.7,37.8 18.4,37.1 18.4,36.6 19.25,35.75 IC1.59@21.8,35.75
SPI_MISO1: IC3.45
SPI_MISO2: IC3.46
SPI_MISO3: IC3.47
SPI_MOSI: IC1.58 IC3.49 | length 22
  L4 w0.127: IC3.49@10.388,45.515 9.515,45.515 8.3,44.3 8.3,40.6 11.7,37.2 17.2,37.2 19.15,35.25 IC1.58@21.8,35.25
SPI_SCLK: IC1.57 IC3.48 | length 18.6
  L1 w0.127: v1(11.6,36.7) v1(11.6,38.7)
  L4 w0.127: IC3.48@11.588,44.315 11.6,44.303 v1(11.6,38.7) ; v1(11.6,36.7) 17.1,36.7 19.05,34.75 IC1.57@21.8,34.75
STAT_LED: IC3.63 R34.2 | length 5
  L4 w0.13: R34.2@8.955,54.75 8.955,51.313 9.153,51.115 IC3.63@10.388,51.115
TCK: IC3.16 J13.1 | length 23
  L1 w0.13: v1(14.912,69.801) 14.912,69.707 15.3,69.319 J13.1@15.3,69.145
  L4 w0.13: v1(14.912,69.801) 14.912,67.787 14.443,67.318 14.443,66.93 14.896,66.476 14.896,65.277 15.9,64.272 17.326,64.272 18.02,64.967 18.434,64.967 18.859,64.542 18.859,60.479 18.756,60.376 18.756,54.471 18.3,54.015 18.238,54.015 17.588,53.365 IC3.16@17.588,52.715
TDC_REFCLK: IC1.40 J1.1 R2.2 | length 21.8
  L4 w0.23: J1.1@24.5,8.875 24.5,13.9 25.8,15.2 25.8,23.5 26.54,24.24 27.34,24.24 R2.2@27.8,24.7 27.75,24.75 IC1.40@27.75,28.8
TDC_RST: IC1.42 IC27.4 | length 31.2
  L1 w0.127: v1(20.9,42.2) 22.8,42.2 26.75,38.25 v1(26.75,32.15)
  L1 w0.13: v1(24.8,53.4) 25.4,54 IC27.4@25.95,54
  L4 w0.127: v1(20.9,42.2) 20.9,43.3 24.2,46.6 24.2,47.7 ; IC1.42@26.75,28.8 v1(26.75,32.15)
  L4 w0.13: 24.2,47.7 24.2,51.9 24.8,52.5 v1(24.8,53.4)
TDC_STOP1: IC1.47 J2.1 R9.2 | length 33.7
  L4 w0.23: J2.1@5.23,8.875 5.23,12.23 7.6,14.6 14.1,14.6 17.8,18.3 17.8,23.5 18.54,24.24 19.34,24.24 R9.2@19.8,24.7 19.8,26 20.6,26.8 23.4,26.8 24.25,27.65 IC1.47@24.25,28.8
TDC_STOP2: IC1.45 J3.1 R15.2 | length 33.6
  L4 w0.23: J3.1@14.865,8.875 18.575,8.875 19.7,10 19.7,11.623 19.7,11.738 ccw(c19.331,11.738) 19.331,12.107 19.122,12.107 cw(c19.122,12.476) 18.753,12.476 18.753,12.968 cw(c19.122,12.968) 19.122,13.337 21.883,13.337 ccw(c21.883,13.706) 22.252,13.706 22.252,14.198 ccw(c21.883,14.198) 21.883,14.567 20.069,14.567 cw(c20.069,14.936) 19.7,14.936 19.7,15.6 19.7,15.9 20.175,16.375 21.275,16.375 21.8,16.9 21.8,23.5 22.54,24.24 23.34,24.24 R15.2@23.8,24.7 23.8,25.7 25.25,27.15 IC1.45@25.25,28.8
TDC_STOP3: IC1.35 J5.1 R18.2 | length 33.6
  L4 w0.23: IC1.35@30.25,28.8 30.25,27.15 31.8,25.6 R18.2@31.8,24.7 31.34,24.24 30.54,24.24 29.8,23.5 29.8,16.5 29.425,16.125 29.3,16 29.3,15.63 ccw(c29.669,15.63) 29.669,15.261 31.59,15.261 cw(c31.59,14.892) 31.959,14.892 31.959,14.4 cw(c31.59,14.4) 31.59,14.031 28.182,14.031 ccw(c28.182,13.662) 27.813,13.662 27.813,13.17 ccw(c28.182,13.17) 28.182,12.801 28.931,12.801 cw(c28.931,12.432) 29.3,12.432 29.3,12.317 29.3,9.9 30.325,8.875 J5.1@34.135,8.875
TDC_STOP4: IC1.33 J6.1 R19.2 | length 33.6
  L4 w0.23: IC1.33@31.25,28.8 31.25,27.55 31.8,27 34.7,27 35.8,25.9 R19.2@35.8,24.7 35.34,24.24 34.54,24.24 33.8,23.5 33.8,15.2 34.5,14.5 42.5,14.5 43.77,13.23 J6.1@43.77,8.875
TDI: IC3.15 J13.9 | length 20.6
  L1 w0.13: v1(13.71,67) 13.71,67.094 13.906,67.29 13.906,67.751 J13.9@14.03,67.875 ; v1(13.763,64.678) 15.461,64.678 15.867,64.272 17.273,64.272 17.51,64.509 v1(18.25,64.509)
  L4 w0.13: v1(13.71,67) 13.757,66.953 13.757,64.684 v1(13.763,64.678) ; IC3.15@17.188,52.715 17.188,53.988 18.25,55.049 18.25,56.655 18.425,56.83 18.425,60.439 18.454,60.468 18.454,61.093 18.425,61.122 18.425,63.242 18.557,63.374 18.557,63.769 18.25,64.075 v1(18.25,64.509)
TDO: IC3.17 J13.3 | length 28.2
  L1 w0.13: v1(12.303,60.78) 12.36,60.723 12.36,60.284 12.716,59.928 18.574,59.928 18.79,60.144 19.163,60.144 v1(19.22,60.201) ; J13.3@12.76,69.145 12.786,69.171 12.786,69.972 v1(12.812,69.998)
  L4 w0.13: v1(12.303,60.78) 12.88,61.357 12.88,66.809 12.81,66.879 12.81,69.997 v1(12.812,69.998) ; IC3.17@18.788,51.515 19.438,51.515 19.73,51.806 19.73,51.85 20.265,52.386 20.265,52.578 20.402,52.715 20.402,53.307 19.22,54.489 v1(19.22,60.201)
TMS: IC3.14 J13.5 | length 25
  L1 w0.13: v1(9.641,68.56) 9.641,68.563 10.22,69.142 J13.5@10.22,69.145 ; v1(12.305,63.528) 12.328,63.551 14.509,63.551 14.6,63.642 16.748,63.642 16.819,63.571 v1(18.08,63.571)
  L4 w0.13: v1(9.641,68.56) 10.533,67.668 11.558,67.668 12.553,66.673 12.553,64.678 12.305,64.431 v1(12.305,63.528) ; IC3.14@16.788,52.715 16.788,54.015 17.948,55.174 17.948,55.455 ; 17.95,55.455 17.95,56.781 18.124,56.955 18.124,60.533 18.153,60.562 18.153,60.998 18.123,61.029 v1@18.123,63.528
TRG: IC27.2 J4.7 J9.7 | length 43.2
  L1 w0.13: J9.7@4,55.8 7.73,55.8 7.981,55.549 9.665,55.549 9.916,55.8 10.855,55.8 11.823,56.768 17.369,56.768 18.537,55.6 25.1,55.6 25.3,55.4 26.5,55.4 26.6,55.5 ; IC27.2@26.6,55.892 26.6,55.5 ; J4.7@45,55.8 42.2,55.8 41.7,55.3 39.984,55.3 39.476,55.809 34.176,55.809 34.093,55.892 27.9,55.892 27.508,55.5 26.6,55.5
TVDD18: C6.1 C7.2 C8.2 IC1.30 IC1.51 R20.2 | length 36.7
  L1 w0.55: v1(18.85,31.45) 19.55,31.45 19.9,31.1 19.9,29.1 22.4,26.6 37.8,26.6 38.975,27.775 38.975,28.05 39.325,28.4 C6.1@39.6,28.4 39.58,28.4 39.23,28.75 R20.2@39.23,30.1 37.9,30.1 37.35,30.65 v1(36.15,30.65)
  L4 w0.3: v1(18.85,31.45) C8.2@19.5,31.45 20.15,31.45 20.45,31.75 IC1.51@21.8,31.75 ; IC1.30@33.2,31.75 34.15,31.75 34.6,31.3 34.6,31 34.95,30.65 C7.2@35.5,30.65 v1(36.15,30.65)
TVDD33: C9.1 C10.2 IC1.32 IC1.44 IC1.49 R1.2 R3.2 R4.2 R5.2 R7.2 R8.2 R12.2 R14.2 R17.2 R21.2 | length 39.4
  L1 w0.3: v1(26.1,27.5) 26.1,27.554 26.25,27.704 R8.2@26.25,28.33
  L1 w0.55: R4.2@21.33,38.9 R3.2@21.33,38 v1(21.33,30.28) 21.33,29.67 22.67,28.33 R7.2@23.75,28.33 R12.2@24.75,28.33 R8.2@26.25,28.33 R1.2@27.25,28.33 R5.2@28.25,28.33 R14.2@29.75,28.33 R17.2@30.75,28.33 34.33,28.33 34.7,28.7 36.9,28.7 v1(37.2,28.4) v1(37.95,28.4)
  L4 w0.3: v1(21.33,30.28) 21.33,30.75 IC1.49@21.8,30.75 ; IC1.44@25.75,28.8 25.75,27.85 v1(26.1,27.5) ; IC1.32@33.2,30.75 33.95,30.75 34.6,30.1 34.6,29 34.85,28.75 C10.2@35.5,28.75
  L4 w0.55: C9.1@39.2,28.4 39.23,28.37 R21.2@39.23,26.6
  L4 w0.6: C10.2@35.5,28.75 36.35,28.75 36.7,28.4 v1(37.2,28.4) v1(37.95,28.4) C9.1@39.2,28.4
pads on no net: IC1.1 IC1.2 IC1.3 IC1.4 IC1.5 IC1.6 IC1.7 IC1.8 IC1.9 IC1.10 IC1.11 IC1.12 IC1.13 IC1.14 IC1.15 IC1.16 IC1.17 IC1.18 IC2.4 IC3.FTG1 IC3.FTG2 IC4.4 IC7.4 J13.6 J13.7 J13.8 J13.Mech

## Polygon pours and split planes (outlines as drawn)
GND on L3 "GND_L03_P012" (solid, pour order 12): 48.6,2.2 48.6,43 47.2,43 47.2,72.8 48.8,72.8 48.8,74.6 0.3,74.6 0.3,72.8 1.8,72.8 1.8,43 0.3,43 0.3,2.2
P5V0 on L3 "P5V0_L03_P007" (solid, remove dead copper, pour order 7): 6.053,69.246 41.9,69.246 41.9,67.544 41.25,67.544 41.25,64.85 37.65,61.25 10.361,61.25 6.5,65.111 6.5,67.494 6.384,67.494 6.053,67.825
P12V0 on L3 "P12V0_L03_P006" (solid, remove dead copper, pour order 6): 5.261,70 5.498,69.602 44.75,69.5 45,69.75 45,73 43.2,74.8 6.811,74.8 5.261,73.25
GND on L1 "GND_L01_P011" (solid, remove dead copper, pour order 11): 42.746,71.3 42.746,52.3 47,52.3 47,51.3 42.746,51.3 42.746,44.8 47.2,44.8 47.2,43 48.6,43 48.6,2.2 0.3,2.2 0.3,43 1.8,43 1.8,44.8 6.254,44.8 6.254,51.3 2,51.3 2,52.3 6.254,52.3 6.254,71.3 1.8,71.3 1.8,72.8 0.3,72.8 0.3,74.6 48.8,74.6 48.8,72.8 47.2,72.8 47.2,71.3
GND on L1 "GND_L01_P010" (solid, pour order 10): 34.025,31.1 33.725,30.8 31.8,30.8 31.6,31 31.6,32.9 31.9,33.2 33.725,33.2 34.025,32.9
DVDD18 on L1 "DVDD18_L01_P009" (solid, pour order 9): 34.025,33.7 31.3,33.7 31,34 31,35.9 31.1,36 33.8,36 34.025,35.775 34.025,35.5
GND on L4 "GND_L04_P013" (solid, remove dead copper, pour order 13): 6.254,44.8 6.254,47.3 2,47.3 2,48.3 6.254,48.3 6.254,55.3 2,55.3 2,56.3 6.254,56.3 6.254,61.8 2,61.8 2,62.8 6.254,62.8 6.254,69.8 1.8,69.8 1.8,72.8 0.3,72.8 0.3,74.6 48.8,74.6 48.8,72.8 47.2,72.8 47.2,69.8 42.746,69.8 42.746,62.8 47,62.8 47,61.8 42.746,61.8 42.746,56.3 47,56.3 47,55.3 42.746,55.3 42.746,48.3 47,48.3 47,47.3 42.746,47.3 42.746,44.8 47.2,44.8 47.2,43 48.6,43 48.6,2.2 0.3,2.2 0.3,43 1.8,43 1.8,44.8
DVDD18 on L4 "DVDD18_L04_P008" (solid, pour order 8): 21.05,36.4 31.3,36.4 31.8,35.9 33.95,35.9 33.95,35.6 32.1,35.6 32,35.5 32,35.1 32.2,34.9 33.95,34.9 33.95,34.6 32.2,34.6 32.1,34.5 32.2,34.4 33.95,34.4 33.95,34.1 32.2,34.1 32.1,34 32.2,33.9 33.95,33.9 33.95,33.6 25.4,33.6 22.9,36.1 21.05,36.1
GND on P2 (split plane): 318 vertices, not listed, extent 0.525,0.525 48.475,75.975

## Keep-outs
KeepOutLayer:
  circle w0.1: c16.57,68.51 r0.7
  circle w0.1: c16.57,71.05 r1.421
  circle w0.1: c10.855,71.05 r1.421
  circle w0.1: c10.855,65.97 r1.421
  circle w0.1: c8.95,67.494 r0.7
  circle w0.1: c8.95,69.526 r0.7
  circle w0.1: c16.57,65.97 r1.421
  lines w0.13: 0,1 0,43.9 0,59.3 1.503,59.3 1.503,65 5.5,65 5.5,65.6 1.5,65.6 1.5,68.4 ; 4.6,65 4.6,65.6 ; 0,69.3 0,69.3

## Other copper
L1:
  rectangle net P12V0: 41.325,66.55 41.802,67.544
  rectangle net P12V0: 41.5,70 42.144,71.375
L3:
  rectangle net P5V0: 6.403,67.994 7.05,69.294
  rectangle net P5V0: 41.1,67.956 41.75,69
  rectangle net P12V0: 41.25,66.5 41.9,67.544
  rectangle net P12V0: 6.118,65.682 7.018,67.156
L4:
  rectangle net P12V0: 41.2,66.3 41.845,67.544
  pour cut-out: 8.5,35.4 8.5,29.4 18.4,29.4 18.4,35.4

## Silkscreen, mask and mechanical layers (free items; w line width, h text height)
TopOverlay:
  text "ID" at 13.134,62.19 h1.52
  text "0" at 16.654,51.931 h1.52
  text "3" at 12.71,51.869 h1.52
  text "SPI" at 41.89,49.224 h1.52 r90
  text "SPI" at 8.092,48.829 h1.52 r90
  text ".ProjectName" at 37.5,42 h1.5
  text "v.Revision" at 37.7,39.7 h1.52
  text "TERM EN" at 1.868,23.654 h1
  text "IN1" at 5.147,13.154 h1
  text "IN2" at 14.615,13.154 h1
  text "CLK" at 23.167,13.154 h1
  text "IN3" at 31.885,13.154 h1
  text "IN4" at 41.52,13.154 h1
Mechanical1:
  lines w0.13: 1.5,43.44 0,43.44 0,0 23,0 49,0 49,43.44 47.5,43.44 47.5,44.5 ; 1.5,59 1.5,57.1 ; 1.5,71.6 1.5,72.5 0,72.5 0,76.5 23,76.5 49,76.5 49,72.5 47.5,72.5 47.5,71.6 ; 47.5,57.1 47.5,59 ; 1.5,57.1 1.5,57.1 ; 47.5,59 47.5,59

## Text inside footprints (layer, text, board x,y; h text height)
SW2: TopOverlay "1" at 11.229,55.455 h1